# Altium PCB TinyTOF-Body.PcbDoc (part 1 of 3)
Units mil, origin at the board's own origin, x right, y up, seen from the top; angles counter-clockwise.
Board outline 6000 x 4000 mil, 6 copper layers (Component Side, Ground Plane (GND), Inner Layer 1, Inner Layer 2, Power Plane (VCC), Solder Side), stack 62.6 mil thick; 146 components, 158 nets, 1020 pads, 350 vias.
Unrouted connection lines stored in the file: 339.
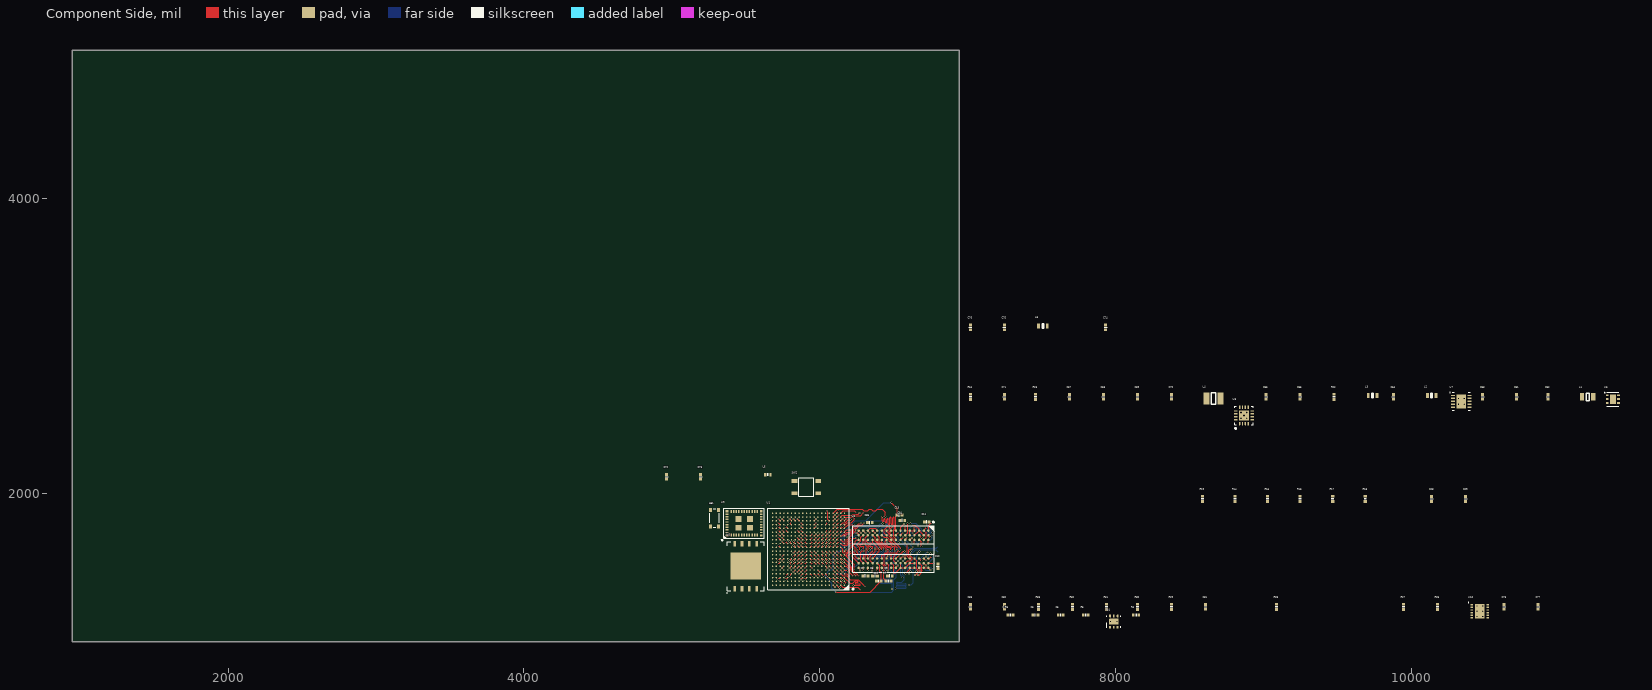
[diagram p0: Component Side view]
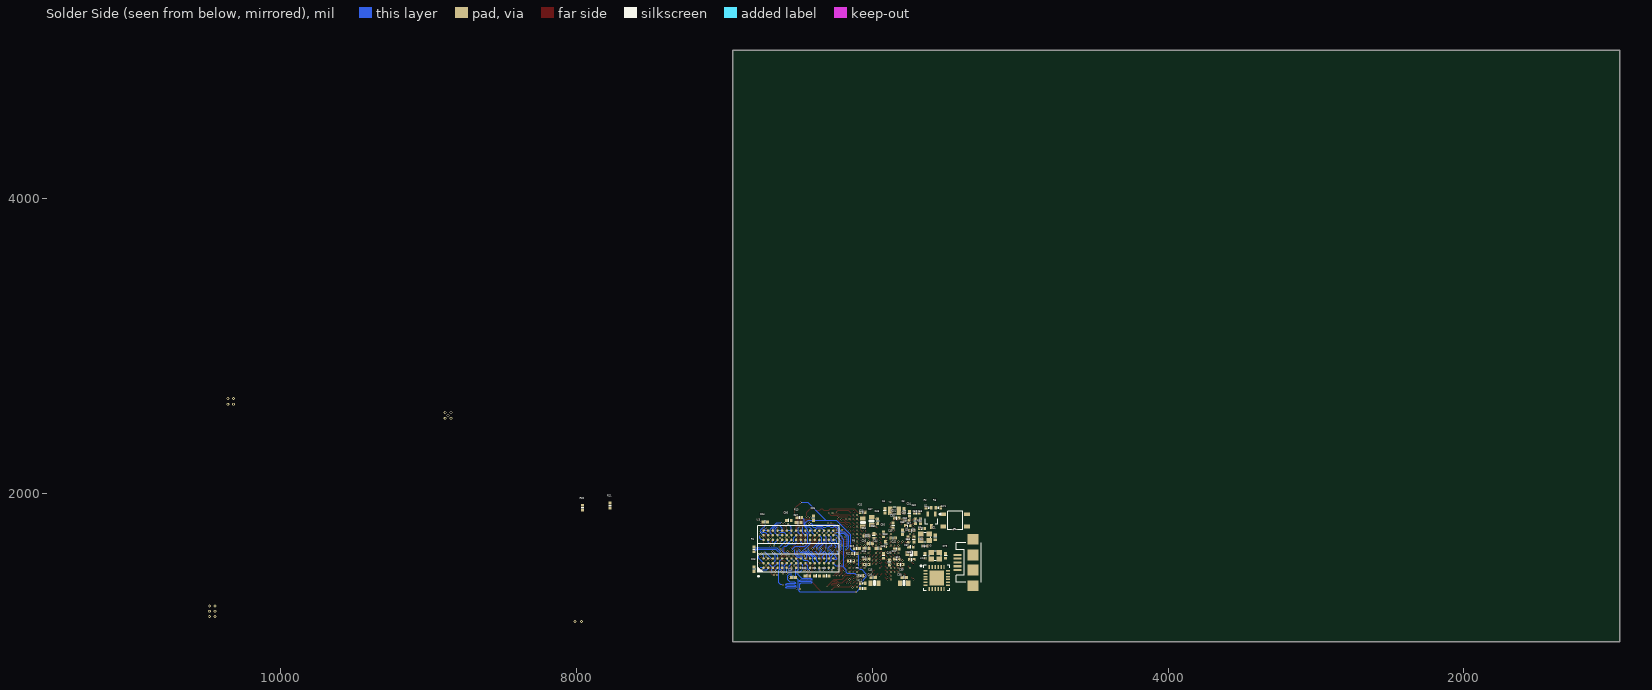
[diagram p1: Solder Side view, seen from below]
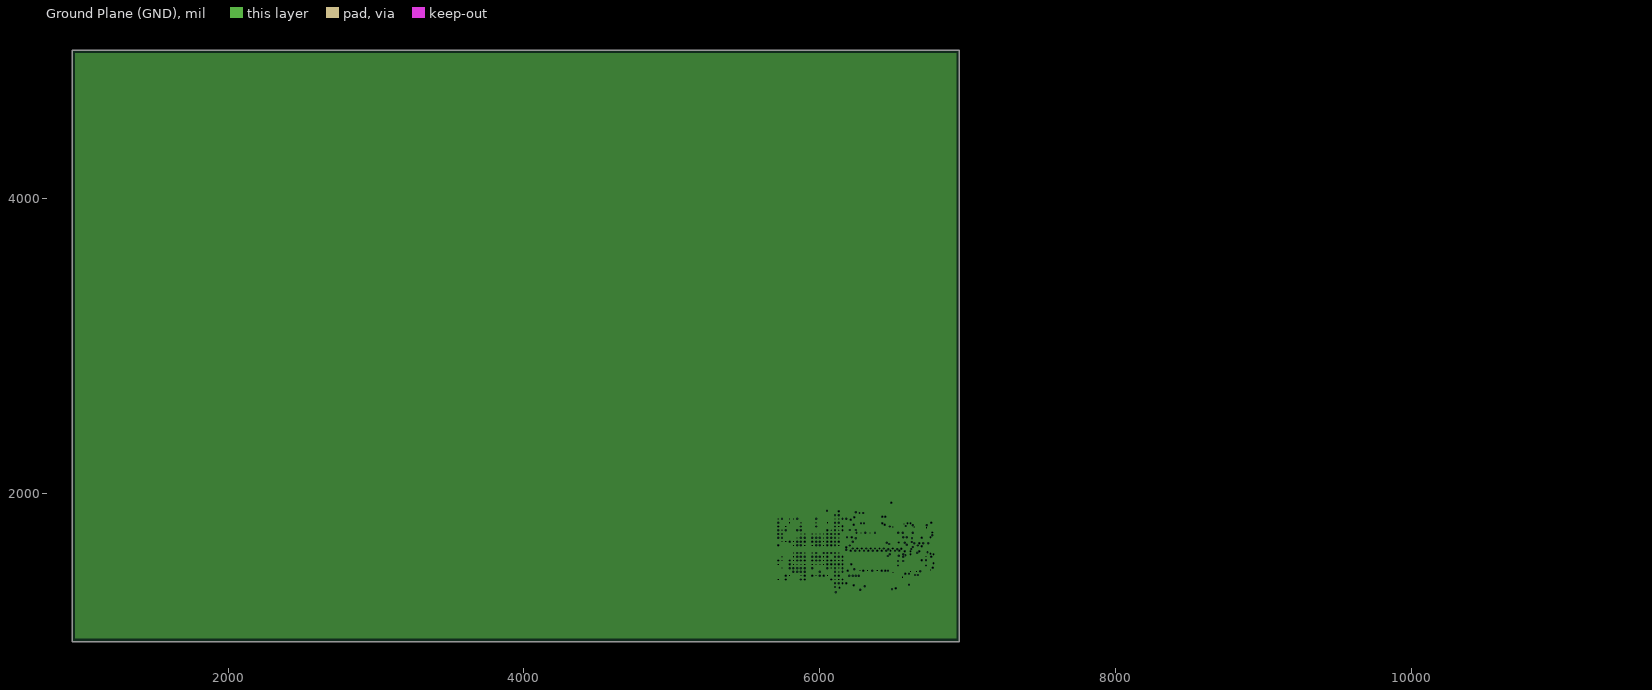
[diagram p2: Ground Plane (GND), clearances drawn from the general rule]
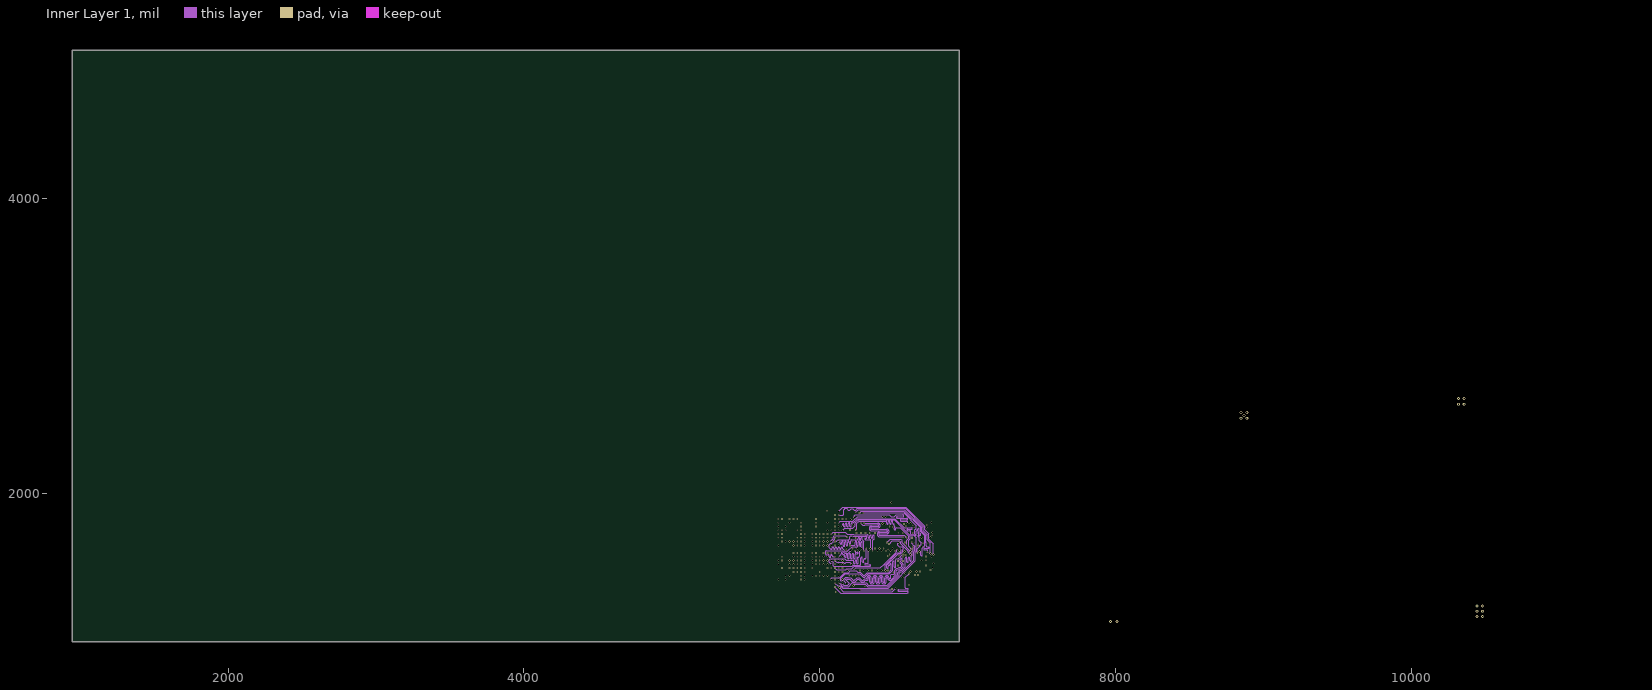
[diagram p3: Inner Layer 1]
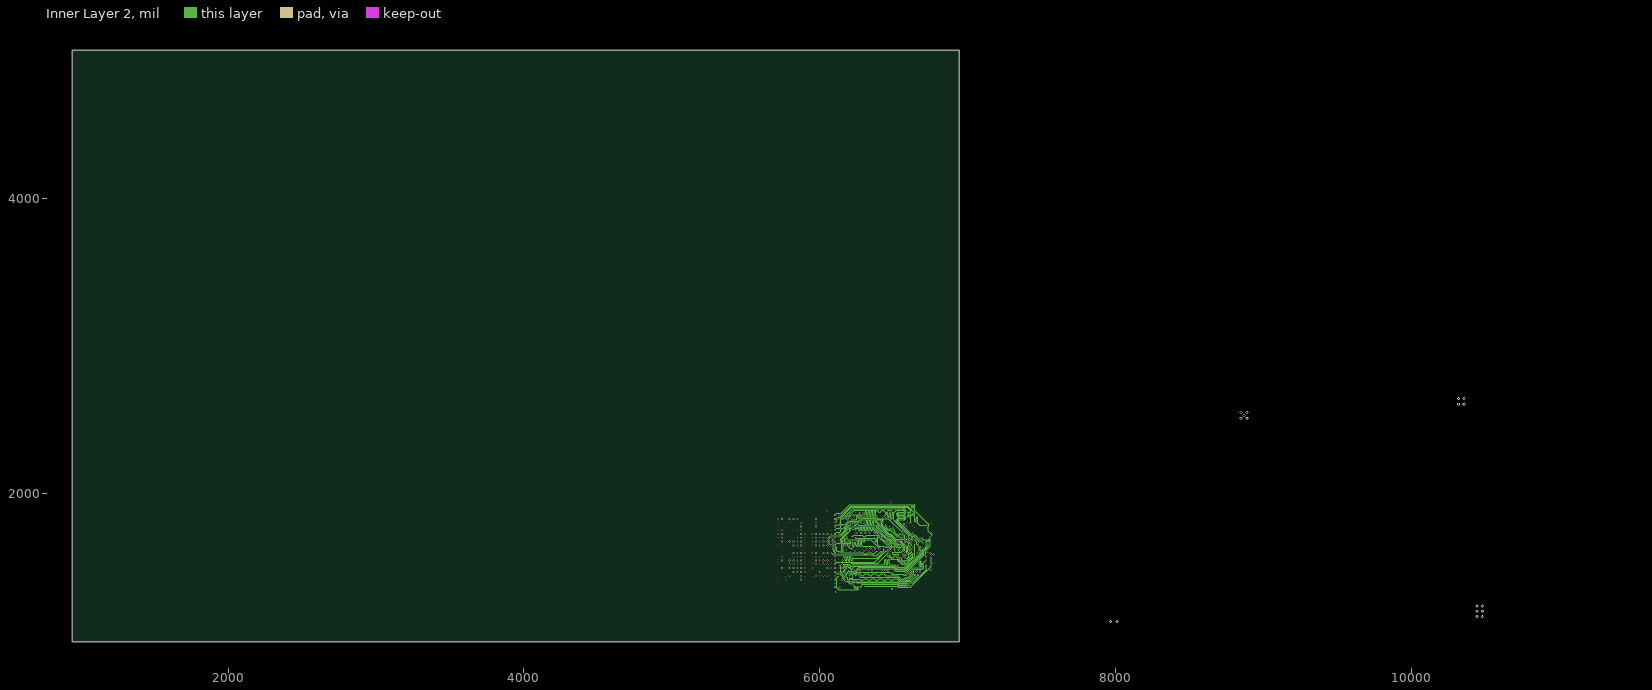
[diagram p4: Inner Layer 2]
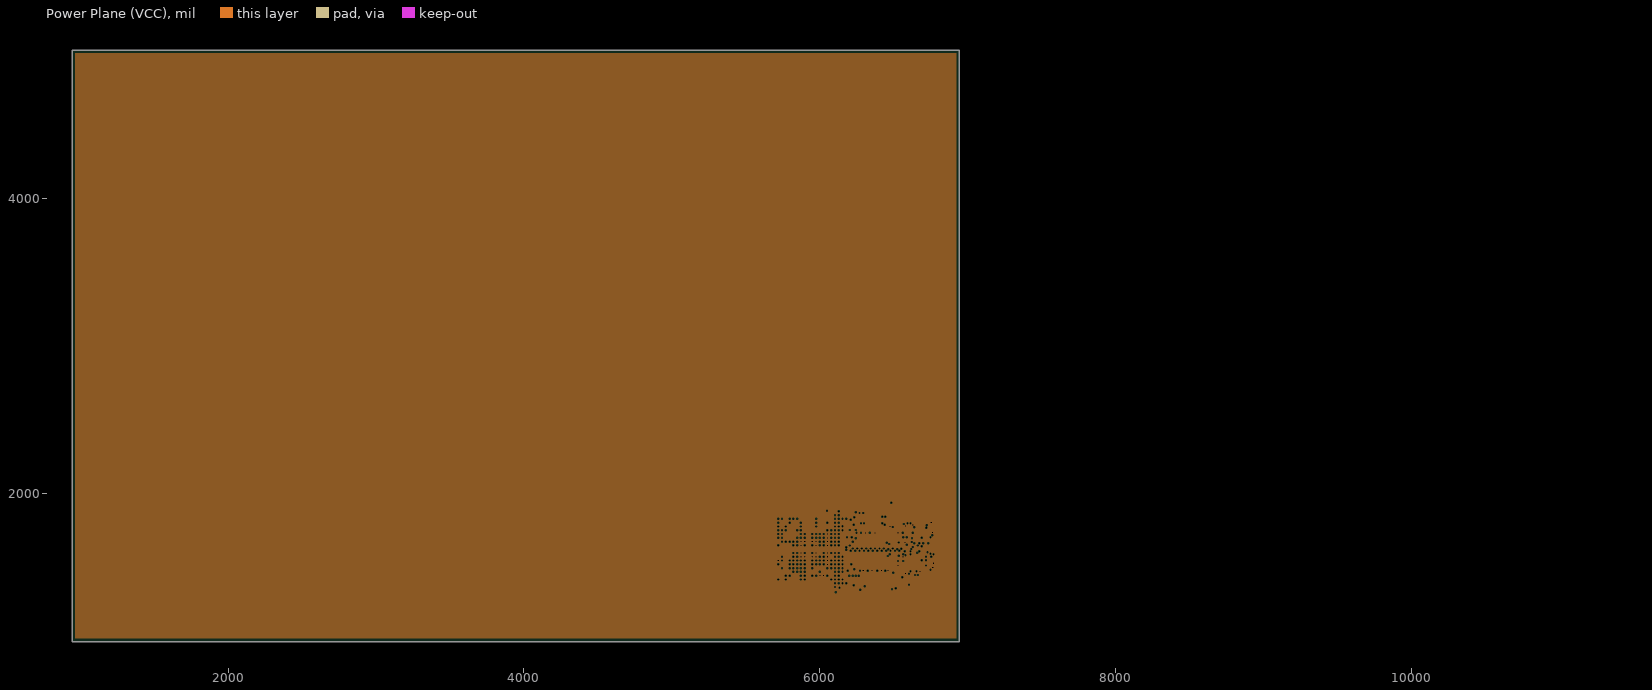
[diagram p5: Power Plane (VCC), clearances drawn from the general rule]

## Layer stack, top to bottom
Top Solder: solder mask 0.4, Solder Resist, Dk 3.5
Component Side: signal copper 1.4
Dielectric 1: prepreg 9.4, FR-4, Dk 4.2
Ground Plane (GND): plane copper 1.4, net GND
Dielectric 3: core 13, Dk 4.2
Inner Layer 1: signal copper 1.4
Dielectric 6: prepreg 9.4, Dk 4.2
Inner Layer 2: signal copper 1.4
Dielectric 5: core 13, Dk 4.2
Power Plane (VCC): plane copper 1.4, net 1V4
Dielectric 4: prepreg 9.4, Dk 4.2
Solder Side: signal copper 1.4
Bottom Solder: solder mask 0.4, Solder Resist, Dk 3.5

## Board outline
945,1000 6945,1000 6945,5000 945,5000

## Design rules (kind name [scope] priority, off if disabled: settings)
Clearance [All] p1: gap=4
DiffPairsRouting [All] p1: maxlimit=10 minlimit=5 mostfreqgap=5 toplayer_minwidth=5 toplayer_maxwidth=15 toplayer_prefwidth=5 midlayer1_minwidth=5 midlayer1_maxwidth=15 midlayer1_prefwidth=5 midlayer2_minwidth=5 midlayer2_maxwidth=15 midlayer2_prefwidth=5 bottomlayer_minwidth=5 bottomlayer_maxwidth=15 bottomlayer_prefwidth=5 maxuncoupledlength=100
Length Length_Clk [InNetClass('DRAM_CLK')] p1: maxlimit=2250 minlimit=0
MatchedLengths MatchedLengths_Clk [InNetClass('DRAM_CLK')] p1: tolerance=5 checknetsindiffpair=TRUE checkdiffpairvsdiffpair=FALSE checkxsignals=FALSE checkothers=FALSE
MatchedLengths MatchedLengths_Ctrl [InNetClass('DRAM_CTRL')] p2: tolerance=50 checknetsindiffpair=FALSE checkdiffpairvsdiffpair=TRUE checkxsignals=TRUE checkothers=TRUE
MatchedLengths MatchedLengths_AddrComm [InNetClass('DRAM_ADDR_COMM')] p3: tolerance=25 checknetsindiffpair=FALSE checkdiffpairvsdiffpair=TRUE checkxsignals=TRUE checkothers=TRUE
MatchedLengths MatchedLengths_1 [InNetClass('DRAM_GROUP1')] p4: tolerance=25 checknetsindiffpair=FALSE checkdiffpairvsdiffpair=TRUE checkxsignals=TRUE checkothers=TRUE
MatchedLengths MatchedLengths_2 [InNetClass('DRAM_GROUP2')] p5: tolerance=25 checknetsindiffpair=FALSE checkdiffpairvsdiffpair=TRUE checkxsignals=TRUE checkothers=TRUE
MatchedLengths MatchedLengths_3 [InNetClass('DRAM_GROUP3')] p6: tolerance=25 checknetsindiffpair=FALSE checkdiffpairvsdiffpair=TRUE checkxsignals=TRUE checkothers=TRUE
MatchedLengths MatchedLengths_4 [InNetClass('DRAM_GROUP4')] p7: tolerance=25 checknetsindiffpair=FALSE checkdiffpairvsdiffpair=TRUE checkxsignals=TRUE checkothers=TRUE
MatchedLengths MatchedLengths_Diff [(InNetClass('DRAM_ADDR_COMM') OR InNetClass('DRAM_GROUP1') OR InNetClass('DRAM_GROUP2') OR InNetClass('DRAM_GROUP3') OR InNetClass('DRAM_GROUP4'))] p8: tolerance=10 checknetsindiffpair=TRUE checkdiffpairvsdiffpair=FALSE checkxsignals=FALSE checkothers=FALSE
PlaneClearance [All] p1: clearance=5
PlaneConnect [All] p1: planeconnectstyle=Direct reliefexpansion=20 reliefentries=4 reliefconductorwidth=10 reliefairgap=10
PolygonConnect [All] p1: connectstyle=Relief reliefconductorwidth=20 reliefentries=4 polygonreliefangle="90 Angle" airgapwidth=5
RoutingVias [All] p1: holewidth=6 width=12 viastyle="Through Hole" minholewidth=6 minwidth=12 maxholewidth=12 maxwidth=24
SolderMaskExpansion SolderMaskExpansion_Via [IsVia] p1: expansion=0 soldermaskfromhole=TRUE
SolderMaskExpansion [All] p2: expansion=2
Width [All] p1: maxlimit=20 minlimit=3 preferedwidth=5
27 further rules are at their usual default settings.

## Classes and differential pairs
component class U_USB: C77 C78 C79 C80 C81 C82 C83 JP1 R26 R27 R28 R29 R30 R31 R32 R33 U10 U11 Y3
net class DRAM_CLK: DRAM_CLK_N DRAM_CLK_P
net class DRAM_A[14..0]: DRAM_A0 DRAM_A1 DRAM_A2 DRAM_A3 DRAM_A4 DRAM_A5 DRAM_A6 DRAM_A7 DRAM_A8 DRAM_A9 DRAM_A10 DRAM_A11 DRAM_A12 DRAM_A13 DRAM_A14
net class DRAM_D[31..0]: DRAM_D0 DRAM_D1 DRAM_D2 DRAM_D3 DRAM_D4 DRAM_D5 DRAM_D6 DRAM_D7 DRAM_D8 DRAM_D9 DRAM_D10 DRAM_D11 DRAM_D12 DRAM_D13 DRAM_D14 DRAM_D15 DRAM_D16 DRAM_D17 DRAM_D18 DRAM_D19 DRAM_D20 DRAM_D21 DRAM_D22 DRAM_D23 DRAM_D24 DRAM_D25 DRAM_D26 DRAM_D27 DRAM_D28 DRAM_D29 DRAM_D30 DRAM_D31
net class DRAM_CTRL: DRAM_CS DRAM_SDCKE DRAM_SDODT
net class DRAM_GROUP1: DRAM_D0 DRAM_D1 DRAM_D2 DRAM_D3 DRAM_D4 DRAM_D5 DRAM_D6 DRAM_D7 DRAM_DQM0 DRAM_DQS0_N DRAM_DQS0_P
net class DRAM_GROUP2: DRAM_D8 DRAM_D9 DRAM_D10 DRAM_D11 DRAM_D12 DRAM_D13 DRAM_D14 DRAM_D15 DRAM_DQM1 DRAM_DQS1_N DRAM_DQS1_P
net class DRAM_GROUP3: DRAM_D16 DRAM_D17 DRAM_D18 DRAM_D19 DRAM_D20 DRAM_D21 DRAM_D22 DRAM_D23 DRAM_DQM2 DRAM_DQS2_N DRAM_DQS2_P
net class DRAM_GROUP4: DRAM_D24 DRAM_D25 DRAM_D26 DRAM_D27 DRAM_D28 DRAM_D29 DRAM_D30 DRAM_D31 DRAM_DQM3 DRAM_DQS3_N DRAM_DQS3_P
net class DRAM_ADDR_COMM: DRAM_A0 DRAM_A1 DRAM_A2 DRAM_A3 DRAM_A4 DRAM_A5 DRAM_A6 DRAM_A7 DRAM_A8 DRAM_A9 DRAM_A10 DRAM_A11 DRAM_A12 DRAM_A13 DRAM_A14 DRAM_CAS DRAM_RAS DRAM_SDBA0 DRAM_SDBA1 DRAM_SDBA2 DRAM_WE
component class U_MPU-Control: C1 C2 C3 C4 C5 C6 Q1 R2 R3 R4 R5 R6 R34 SW1 SW2 U4 Y1 Y2
component class U_MPU-Memory: C7 C8 C9 C10 C11 C12 C13 C14 C15 C16 C17 C18 C19 C20 C21 C22 C23 C24 C25 C26 C84 C85 C86 C87 R1 R7 R8 R9 R10 R11 R12 R13 U2 U3
component class U_MPU-Peripherals: C27 C28 C29 C30 C31 C32 C33 C34 R14 R15 R16 R17 R18 R19 R20 R21 R25 U5
component class U_MPU-Power: C35 C36 C37 C38 C39 C40 C41 C42 C43 C44 C45 C46 C47 C48 C49 C50 C51 C52 C53 C54 C55 C56 C57 C58 C59 C60 U1
component class U_Supplies: C61 C62 C63 C64 C65 C66 C67 C68 C69 C70 C71 D1 L1 L2 L3 L4 R22 R23 R24 U6 U7 U8
component class U_WiFi: AE1 C72 C73 C74 C75 C76 L5 L6 U9
differential pair USB_OTG: +USB_OTG_P -USB_OTG_N
differential pair DRAM_DQS0: +DRAM_DQS0_P -DRAM_DQS0_N
differential pair DRAM_DQS1: +DRAM_DQS1_P -DRAM_DQS1_N
differential pair DRAM_DQS2: +DRAM_DQS2_P -DRAM_DQS2_N
differential pair DRAM_DQS3: +DRAM_DQS3_P -DRAM_DQS3_N
differential pair DRAM_CLK: +DRAM_CLK_P -DRAM_CLK_N

## Components (designator, comment, footprint, x,y, rotation, side; value= is the part's Value field where it differs from the comment)
AE1 "2450AT18D0100E" ANTENNA 5290,1835 r90 top
C1 "12pF 50V 0402" C0402[1005X55] 5575,1705 r90 bottom
C2 "12pF 50V 0402" C0402[1005X55] 5645,1645 r0 bottom
C3 "12pF 50V 0402" C0402[1005X55] 5785,1885 r270 bottom
C4 "12pF 50V 0402" C0402[1005X55] 5915,1885 r270 bottom
C5 "0.1uF 6.3V 0402" C0402[1005X55] 7630,1180 r0 top
C6 "3.3nF 50V 0402" C0402[1005X55] 7460,1180 r0 top
C7 "0.22uF 6.3V 0402" C0402[1005X55] 6310,1445 r180 top
C8 "0.22uF 6.3V 0402" C0402[1005X55] 6375,1445 r180 top
C9 "0.22uF 6.3V 0402" C0402[1005X55] 6475,1445 r180 top
C10 "0.22uF 6.3V 0402" C0402[1005X55] 6800,1510 r90 top
C11 "0.22uF 6.3V 0402" C0402[1005X55] 6725,1810 r0 top
C12 "0.22uF 6.3V 0402" C0402[1005X55] 6400,1410 r0 top
C13 "0.22uF 6.3V 0402" C0402[1005X55] 6540,1855 r180 top
C14 "0.22uF 6.3V 0402" C0402[1005X55] 6040,1715 r0 bottom
C15 "0.22uF 6.3V 0402" C0402[1005X55] 6040,1560 r0 bottom
C16 "0.22uF 6.3V 0402" C0402[1005X55] 6040,1630 r0 bottom
C17 "0.22uF 6.3V 0402" C0402[1005X55] 6040,1520 r0 bottom
C18 "22uF 6.3V 0603" C0603[1608X92] 6065,1805 r270 bottom
C19 "0.1uF 6.3V 0402" C0402[1005X55] 6120,1595 r180 bottom
C20 "0.22uF 6.3V 0402" C0402[1005X55] 6310,1445 r180 bottom
C21 "0.22uF 6.3V 0402" C0402[1005X55] 6375,1445 r180 bottom
C22 "0.22uF 6.3V 0402" C0402[1005X55] 6440,1445 r180 bottom
C23 "0.22uF 6.3V 0402" C0402[1005X55] 6800,1490 r90 bottom
C24 "0.22uF 6.3V 0402" C0402[1005X55] 6725,1810 r0 bottom
C25 "0.22uF 6.3V 0402" C0402[1005X55] 6400,1835 r270 bottom
C26 "0.22uF 6.3V 0402" C0402[1005X55] 6535,1435 r180 bottom
C27 "0.22uF 6.3V 0402" C0402[1005X55] 5810,1520 r180 bottom
C28 "0.22uF 6.3V 0402" C0402[1005X55] 10140,1965 r90 top
C29 "4.7uF 6.3V 0402" C0402[1005X55] 10370,1965 r90 top
C30 "0.22uF 6.3V 0402" C0402[1005X55] 5860,1785 r270 bottom
C31 "0.22uF 6.3V 0402" C0402[1005X55] 5835,1835 r0 bottom
C32 "1uF 16V 0402" C0402[1005X55] 5700,1870 r180 bottom
C33 "0.22uF 6.3V 0402" C0402[1005X55] 5770,1820 r180 bottom
C34 "10uF 6.3V 0402" C0402[1005X55] 5750,1865 r270 bottom
C35 "0.22uF 6.3V 0402" C0402[1005X55] 5735,1555 r180 bottom
C36 "0.22uF 6.3V 0402" C0402[1005X55] 5925,1580 r270 bottom
C37 "22uF 6.3V 0603" C0603[1608X92] 5735,1595 r180 bottom
C38 "22uF 6.3V 0603" C0603[1608X92] 5785,1395 r180 bottom
C39 "0.22uF 6.3V 0402" C0402[1005X55] 5785,1435 r180 bottom
C40 "0.22uF 6.3V 0402" C0402[1005X55] 5885,1535 r90 bottom
C41 "0.22uF 6.3V 0402" C0402[1005X55] 5835,1560 r0 bottom
C42 "0.22uF 6.3V 0402" C0402[1005X55] 5835,1625 r0 bottom
C43 "0.22uF 6.3V 0402" C0402[1005X55] 5910,1660 r90 bottom
C44 "0.22uF 6.3V 0402" C0402[1005X55] 5960,1630 r0 bottom
C45 "0.22uF 6.3V 0402" C0402[1005X55] 5995,1435 r0 bottom
C46 "22uF 6.3V 0603" C0603[1608X92] 5985,1395 r0 bottom
C47 "22uF 6.3V 0603" C0603[1608X92] 6005,1815 r90 bottom
C48 "0.22uF 6.3V 0402" C0402[1005X55] 5965,1815 r90 bottom
C49 "0.22uF 6.3V 0402" C0402[1005X55] 5860,1700 r0 bottom
C50 "0.22uF 6.3V 0402" C0402[1005X55] 5925,1725 r270 bottom
C51 "0.22uF 6.3V 0402" C0402[1005X55] 5990,1715 r270 bottom
C52 "0.22uF 6.3V 0402" C0402[1005X55] 6015,1665 r180 bottom
C53 "4.7uF 6.3V 0402" C0402[1005X55] 5740,1640 r180 bottom
C54 "4.7uF 6.3V 0402" C0402[1005X55] 5760,1690 r90 bottom
C55 "0.22uF 6.3V 0402" C0402[1005X55] 5720,1690 r90 bottom
C56 "0.22uF 6.3V 0402" C0402[1005X55] 5795,1740 r270 bottom
C57 "4.7uF 6.3V 0402" C0402[1005X55] 5735,1750 r180 bottom
C58 "4.7uF 6.3V 0402" C0402[1005X55] 5675,1815 r270 bottom
C59 "0.22uF 6.3V 0402" C0402[1005X55] 5710,1815 r270 bottom
C60 "0.22uF 6.3V 0402" C0402[1005X55] 5760,1785 r180 bottom
C61 "10uF 6.3V 0402" C0402[1005X55] 10715,2655 r90 top
C62 "10uF 6.3V 0402" C0402[1005X55] 10925,2655 r90 top
C63 "10uF 6.3V 0402" C0402[1005X55] 10485,2655 r90 top
C64 "10uF 6.3V 0402" C0402[1005X55] 9880,2655 r90 top
C65 "10uF 6.3V 0402" C0402[1005X55] 9250,2655 r90 top
C66 "3.3nF 50V 0402" C0402[1005X55] 9020,2655 r90 top
C67 "10uF 6.3V 0402" C0402[1005X55] 7690,2655 r90 top
C68 "0.1uF 6.3V 0402" C0402[1005X55] 7920,2655 r90 top
C69 "10uF 6.3V 0402" C0402[1005X55] 8150,2655 r90 top
C70 "10uF 6.3V 0402" C0402[1005X55] 8380,2655 r90 top
C71 "3.3nF 50V 0402" C0402[1005X55] 7250,2655 r90 top
C72 "1.5pF 50V 0402" C0402[1005X55] 4965,2115 r90 top
C73 "1.5pF 50V 0402" C0402[1005X55] 5195,2115 r90 top
C74 "2.2uF 6.3V 0402" C0402[1005X55] 7935,3125 r90 top
C75 "4.7uF 6.3V 0402" C0402[1005X55] 7250,3125 r90 top
C76 "4.7uF 6.3V 0402" C0402[1005X55] 7020,3125 r90 top
C77 "4.7uF 6.3V 0402" C0402[1005X55] 10860,1235 r90 top
C78 "0.1uF 6.3V 0402" C0402[1005X55] 10630,1235 r90 top
C79 "12pF 50V 0402" C0402[1005X55] 5505,1580 r90 bottom
C80 "12pF 50V 0402" C0402[1005X55] 5645,1580 r270 bottom
C81 "1uF 6.3V 0402" C0402[1005X55] 8610,1235 r90 top
C82 "1uF 6.3V 0402" C0402[1005X55] 7250,1235 r90 top
C83 "0.1uF 6.3V 0402" C0402[1005X55] 7020,1235 r90 top
C84 "0.22uF 6.3V 0402" C0402[1005X55] 6560,1820 r0 top
C85 "0.22uF 6.3V 0402" C0402[1005X55] 6340,1805 r180 top
C86 "0.22uF 6.3V 0402" C0402[1005X55] 6565,1820 r180 bottom
C87 "0.22uF 6.3V 0402" C0402[1005X55] 6500,1805 r180 bottom
JP1 "USB" USB-MICROB 5320,1535 r90 bottom
L1 "2.2uH" IND0805 11195,2655 r0 top
L2 "2.2uH" IND0603 10140,2665 r0 top
L3 "2.2uH" IND0603 9740,2665 r0 top
L4 "2.2uH" IND1008 8665,2645 r0 top
L5 "3.9nH" IND0402 5650,2130 r0 top
L6 "2.2uH" IND0603 7510,3135 r0 top
Q1 "BSS123WQ-7-F" SOT323-3 5600,1820 r270 bottom
R1 "200R 1% 0402" R0402[1005] 6800,1625 r90 bottom
R2 "10K 1% 0402" R0402[1005] 5620,1905 r0 bottom
R3 "10K 1% 0402" R0402[1005] 5555,1905 r0 bottom
R4 "10K 1% 0402" R0402[1005] 8140,1180 r0 top
R5 "15K 1% 0402" R0402[1005] 7800,1180 r0 top
R6 "75K 1% 0402" R0402[1005] 7290,1180 r0 top
R7 "240R 1% 0402" R0402[1005] 6465,1410 r0 top
R8 "10K 1% 0402" R0402[1005] 6105,1630 r180 bottom
R9 "10K 1% 0402" R0402[1005] 6080,1445 r0 bottom
R10 "1K 1% 0402" R0402[1005] 6065,1395 r180 bottom
R11 "1K 1% 0402" R0402[1005] 6065,1360 r0 bottom
R12 "240R 1% 0402" R0402[1005] 6145,1545 r0 bottom
R13 "240R 1% 0402" R0402[1005] 6495,1840 r0 bottom
R14 "100K 1% 0402" R0402[1005] 8810,1965 r90 top
R15 "100K 1% 0402" R0402[1005] 9030,1965 r90 top
R16 "100K 1% 0402" R0402[1005] 9250,1965 r90 top
R17 "100K 1% 0402" R0402[1005] 9470,1965 r90 top
R18 "100K 1% 0402" R0402[1005] 9690,1965 r90 top
R19 "10R 1% 0402" R0402[1005] 8590,1965 r90 top
R20 "4K7 1% 0402" R0402[1005] 7960,1905 r90 bottom
R21 "4K7 1% 0402" R0402[1005] 7775,1920 r90 bottom
R22 "1M 1% 0402" R0402[1005] 9480,2655 r90 top
R23 "150K 1% 0402" R0402[1005] 7460,2655 r90 top
R24 "200K 1% 0402" R0402[1005] 7020,2655 r90 top
R25 "10K 1% 0402" R0402[1005] 6065,1875 r180 bottom
R26 "22R 1% 0402" R0402[1005] 10180,1235 r90 top
R27 "22R 1% 0402" R0402[1005] 9950,1235 r90 top
R28 "12K 1% 0402" R0402[1005] 9090,1235 r90 top
R29 "51K 1% 0402" R0402[1005] 8380,1235 r90 top
R30 "100K 1% 0402" R0402[1005] 8150,1235 r90 top
R31 "100K 1% 0402" R0402[1005] 7940,1235 r90 top
R32 "51K 1% 0402" R0402[1005] 7710,1235 r90 top
R33 "51K 1% 0402" R0402[1005] 7480,1235 r90 top
R34 "2M2 1% 0402" R0402[1005] 5665,1765 r0 bottom
SW1 "BOOT" SWITCH 5440,1820 r0 bottom
SW2 "RESET" SWITCH 5910,2045 r0 top
U1 "MCIMX6X3EVO10AB" BGA-400 5925,1625 r180 top
U2 "MT41K256M16TW-107" BGA-96 6500,1625 r270 top
U3 "MT41K256M16TW-107" BGA-96 6500,1625 r90 bottom
U4 "TPS3808G12DRVR" DRV0006A_V 7990,1135 r90 top
U5 "W25N01GVZEIG" "WSON-8 (6X8MM)" 5500,1510 r90 top
U6 "TPS62291DRVR" WSON-6 11365,2640 r0 top
U7 "LTC3407EDD-3#PBF" LT-DD-10_V 10340,2625 r0 top
U8 "TPS62130RGTR" RGT0016C_V 8870,2530 r90 top
U9 "LBWA1KL1FX-875" LGA-42 5490,1800 r90 top
U10 "FT234XD-R" DFN-12_V 10465,1205 r0 top
U11 "USB2422/MJ" "QFN-24 (4x4MM)" 5565,1430 r180 bottom
Y1 "24MHz" CRYSTAL_2.0x1.6 5645,1705 r180 bottom
Y2 "32.768kHz" CRYSTAL_2.0x1.2 5850,1885 r0 bottom
Y3 "24MHz" CRYSTAL_2.0x1.6 5575,1580 r0 bottom

## Footprints (in the part's own frame and the unit in brackets; to place one, negate y for a bottom-side part, rotate by r counter-clockwise, add the part's x,y. Pads: shape width x height; smd on the part's side, far side on the other; paste and mask are expansions set on the pad)
ANTENNA [mm]
  rect 0.7x0.5 smd: 1(-1.4,-0.7) 2(1.4,-0.7) 3(1.4,0.7) 4(-1.4,0.7)
  silkscreen extent -1.6,-0.8 1.6,0.8, body extent -1.6,-0.8 1.6,0.8, height 1.2
BGA-96 [mm] "BGA, 96-Leads, Body 8.00x14.00mmx1.10mm, Pitch 0.80mm"
  round 0.42 smd: A1(-3.2,6) A2(-2.4,6) A3(-1.6,6) A7(1.6,6) A8(2.4,6) A9(3.2,6) B1(-3.2,5.2) B2(-2.4,5.2) B3(-1.6,5.2) B7(1.6,5.2) B8(2.4,5.2) B9(3.2,5.2) C1(-3.2,4.4) C2(-2.4,4.4) C3(-1.6,4.4) C7(1.6,4.4) C8(2.4,4.4) C9(3.2,4.4) D1(-3.2,3.6) D2(-2.4,3.6) D3(-1.6,3.6) D7(1.6,3.6) D8(2.4,3.6) D9(3.2,3.6) E1(-3.2,2.8) E2(-2.4,2.8) E3(-1.6,2.8) E7(1.6,2.8) E8(2.4,2.8) E9(3.2,2.8) F1(-3.2,2) F2(-2.4,2) F3(-1.6,2) F7(1.6,2) F8(2.4,2) F9(3.2,2) G1(-3.2,1.2) G2(-2.4,1.2) G3(-1.6,1.2) G7(1.6,1.2) G8(2.4,1.2) G9(3.2,1.2) H1(-3.2,0.4) H2(-2.4,0.4) H3(-1.6,0.4) H7(1.6,0.4) H8(2.4,0.4) H9(3.2,0.4) J1(-3.2,-0.4) J2(-2.4,-0.4) J3(-1.6,-0.4) J7(1.6,-0.4) J8(2.4,-0.4) J9(3.2,-0.4) K1(-3.2,-1.2) K2(-2.4,-1.2) K3(-1.6,-1.2) K7(1.6,-1.2) K8(2.4,-1.2) K9(3.2,-1.2) L1(-3.2,-2) L2(-2.4,-2) L3(-1.6,-2) L7(1.6,-2) L8(2.4,-2) L9(3.2,-2) M1(-3.2,-2.8) M2(-2.4,-2.8) M3(-1.6,-2.8) M7(1.6,-2.8) M8(2.4,-2.8) M9(3.2,-2.8) N1(-3.2,-3.6) N2(-2.4,-3.6) N3(-1.6,-3.6) N7(1.6,-3.6) N8(2.4,-3.6) N9(3.2,-3.6) P1(-3.2,-4.4) P2(-2.4,-4.4) P3(-1.6,-4.4) P7(1.6,-4.4) P8(2.4,-4.4) P9(3.2,-4.4) R1(-3.2,-5.2) R2(-2.4,-5.2) R3(-1.6,-5.2) R7(1.6,-5.2) R8(2.4,-5.2) R9(3.2,-5.2) T1(-3.2,-6) T2(-2.4,-6) T3(-1.6,-6) T7(1.6,-6) T8(2.4,-6) T9(3.2,-6)
  silkscreen extent -4.77,-7 4,7, body extent -4,-7 4,7, height 1.1
BGA-400 [mm] "BGA, 400-Leads, Body 14.00x14.00mmx1.30mm, Pitch 0.65mm"
  round 0.25 smd: A1(-6.175,6.175) A2(-5.525,6.175) A3(-4.875,6.175) A4(-4.225,6.175) A5(-3.575,6.175) A6(-2.925,6.175) A7(-2.275,6.175) A8(-1.625,6.175) A9(-0.975,6.175) A10(-0.325,6.175) A11(0.325,6.175) A12(0.975,6.175) A13(1.625,6.175) A14(2.275,6.175) A15(2.925,6.175) A16(3.575,6.175) A17(4.225,6.175) A18(4.875,6.175) A19(5.525,6.175) A20(6.175,6.175) B1(-6.175,5.525) B2(-5.525,5.525) B3(-4.875,5.525) B4(-4.225,5.525) B5(-3.575,5.525) B6(-2.925,5.525) B7(-2.275,5.525) B8(-1.625,5.525) B9(-0.975,5.525) B10(-0.325,5.525) B11(0.325,5.525) B12(0.975,5.525) B13(1.625,5.525) B14(2.275,5.525) B15(2.925,5.525) B16(3.575,5.525) B17(4.225,5.525) B18(4.875,5.525) B19(5.525,5.525) B20(6.175,5.525) C1(-6.175,4.875) C2(-5.525,4.875) C3(-4.875,4.875) C4(-4.225,4.875) C5(-3.575,4.875) C6(-2.925,4.875) C7(-2.275,4.875) C8(-1.625,4.875) C9(-0.975,4.875) C10(-0.325,4.875) C11(0.325,4.875) C12(0.975,4.875) C13(1.625,4.875) C14(2.275,4.875) C15(2.925,4.875) C16(3.575,4.875) C17(4.225,4.875) C18(4.875,4.875) C19(5.525,4.875) C20(6.175,4.875) D1(-6.175,4.225) D2(-5.525,4.225) D3(-4.875,4.225) D4(-4.225,4.225) D5(-3.575,4.225) D6(-2.925,4.225) D7(-2.275,4.225) D8(-1.625,4.225) D9(-0.975,4.225) D10(-0.325,4.225) D11(0.325,4.225) D12(0.975,4.225) D13(1.625,4.225) D14(2.275,4.225) D15(2.925,4.225) D16(3.575,4.225) D17(4.225,4.225) D18(4.875,4.225) D19(5.525,4.225) D20(6.175,4.225) E1(-6.175,3.575) E2(-5.525,3.575) E3(-4.875,3.575) E4(-4.225,3.575) E5(-3.575,3.575) E6(-2.925,3.575) E7(-2.275,3.575) E8(-1.625,3.575) E9(-0.975,3.575) E10(-0.325,3.575) E11(0.325,3.575) E12(0.975,3.575) E13(1.625,3.575) E14(2.275,3.575) E15(2.925,3.575) E16(3.575,3.575) E17(4.225,3.575) E18(4.875,3.575) E19(5.525,3.575) E20(6.175,3.575) F1(-6.175,2.925) F2(-5.525,2.925) F3(-4.875,2.925) F4(-4.225,2.925) F5(-3.575,2.925) F6(-2.925,2.925) F7(-2.275,2.925) F8(-1.625,2.925) F9(-0.975,2.925) F10(-0.325,2.925) F11(0.325,2.925) F12(0.975,2.925) F13(1.625,2.925) F14(2.275,2.925) F15(2.925,2.925) F16(3.575,2.925) F17(4.225,2.925) F18(4.875,2.925) F19(5.525,2.925) F20(6.175,2.925) G1(-6.175,2.275) G2(-5.525,2.275) G3(-4.875,2.275) G4(-4.225,2.275) G5(-3.575,2.275) G6(-2.925,2.275) G7(-2.275,2.275) G8(-1.625,2.275) G9(-0.975,2.275) G10(-0.325,2.275) G11(0.325,2.275) G12(0.975,2.275) G13(1.625,2.275) G14(2.275,2.275) G15(2.925,2.275) G16(3.575,2.275) G17(4.225,2.275) G18(4.875,2.275) G19(5.525,2.275) G20(6.175,2.275) H1(-6.175,1.625) H2(-5.525,1.625) H3(-4.875,1.625) H4(-4.225,1.625) H5(-3.575,1.625) H6(-2.925,1.625) H7(-2.275,1.625) H8(-1.625,1.625) H9(-0.975,1.625) H10(-0.325,1.625) H11(0.325,1.625) H12(0.975,1.625) H13(1.625,1.625) H14(2.275,1.625) H15(2.925,1.625) H16(3.575,1.625) H17(4.225,1.625) H18(4.875,1.625) H19(5.525,1.625) H20(6.175,1.625) J1(-6.175,0.975) J2(-5.525,0.975) J3(-4.875,0.975) J4(-4.225,0.975) J5(-3.575,0.975) J6(-2.925,0.975) J7(-2.275,0.975) J8(-1.625,0.975) J9(-0.975,0.975) J10(-0.325,0.975) J11(0.325,0.975) J12(0.975,0.975) J13(1.625,0.975) J14(2.275,0.975) J15(2.925,0.975) J16(3.575,0.975) J17(4.225,0.975) J18(4.875,0.975) J19(5.525,0.975) J20(6.175,0.975) K1(-6.175,0.325) K2(-5.525,0.325) K3(-4.875,0.325) K4(-4.225,0.325) K5(-3.575,0.325) K6(-2.925,0.325) K7(-2.275,0.325) K8(-1.625,0.325) K9(-0.975,0.325) K10(-0.325,0.325) K11(0.325,0.325) K12(0.975,0.325) K13(1.625,0.325) K14(2.275,0.325) K15(2.925,0.325) K16(3.575,0.325) K17(4.225,0.325) K18(4.875,0.325) K19(5.525,0.325) K20(6.175,0.325) L1(-6.175,-0.325) L2(-5.525,-0.325) L3(-4.875,-0.325) L4(-4.225,-0.325) L5(-3.575,-0.325) L6(-2.925,-0.325) L7(-2.275,-0.325) L8(-1.625,-0.325) L9(-0.975,-0.325) L10(-0.325,-0.325) L11(0.325,-0.325) L12(0.975,-0.325) L13(1.625,-0.325) L14(2.275,-0.325) L15(2.925,-0.325) L16(3.575,-0.325) L17(4.225,-0.325) L18(4.875,-0.325) L19(5.525,-0.325) L20(6.175,-0.325) M1(-6.175,-0.975) M2(-5.525,-0.975) M3(-4.875,-0.975) M4(-4.225,-0.975) M5(-3.575,-0.975) M6(-2.925,-0.975) M7(-2.275,-0.975) M8(-1.625,-0.975) M9(-0.975,-0.975) M10(-0.325,-0.975) M11(0.325,-0.975) M12(0.975,-0.975) M13(1.625,-0.975) M14(2.275,-0.975) M15(2.925,-0.975) M16(3.575,-0.975) M17(4.225,-0.975) M18(4.875,-0.975) M19(5.525,-0.975) M20(6.175,-0.975) N1(-6.175,-1.625) N2(-5.525,-1.625) N3(-4.875,-1.625) N4(-4.225,-1.625) N5(-3.575,-1.625) N6(-2.925,-1.625) N7(-2.275,-1.625) N8(-1.625,-1.625) N9(-0.975,-1.625) N10(-0.325,-1.625) N11(0.325,-1.625) N12(0.975,-1.625) N13(1.625,-1.625) N14(2.275,-1.625) N15(2.925,-1.625) N16(3.575,-1.625) N17(4.225,-1.625) N18(4.875,-1.625) N19(5.525,-1.625) N20(6.175,-1.625) P1(-6.175,-2.275) P2(-5.525,-2.275) P3(-4.875,-2.275) P4(-4.225,-2.275) P5(-3.575,-2.275) P6(-2.925,-2.275) P7(-2.275,-2.275) P8(-1.625,-2.275) P9(-0.975,-2.275) P10(-0.325,-2.275) P11(0.325,-2.275) P12(0.975,-2.275) P13(1.625,-2.275) P14(2.275,-2.275) P15(2.925,-2.275) P16(3.575,-2.275) P17(4.225,-2.275) P18(4.875,-2.275) P19(5.525,-2.275) P20(6.175,-2.275) R1(-6.175,-2.925) R2(-5.525,-2.925) R3(-4.875,-2.925) R4(-4.225,-2.925) R5(-3.575,-2.925) R6(-2.925,-2.925) R7(-2.275,-2.925) R8(-1.625,-2.925) R9(-0.975,-2.925) R10(-0.325,-2.925) R11(0.325,-2.925) R12(0.975,-2.925) R13(1.625,-2.925) R14(2.275,-2.925) R15(2.925,-2.925) R16(3.575,-2.925) R17(4.225,-2.925) R18(4.875,-2.925) R19(5.525,-2.925) R20(6.175,-2.925) T1(-6.175,-3.575) T2(-5.525,-3.575) T3(-4.875,-3.575) T4(-4.225,-3.575) T5(-3.575,-3.575) T6(-2.925,-3.575) T7(-2.275,-3.575) T8(-1.625,-3.575) T9(-0.975,-3.575) T10(-0.325,-3.575) T11(0.325,-3.575) T12(0.975,-3.575) T13(1.625,-3.575) T14(2.275,-3.575) T15(2.925,-3.575) T16(3.575,-3.575) T17(4.225,-3.575) T18(4.875,-3.575) T19(5.525,-3.575) T20(6.175,-3.575) U1(-6.175,-4.225) U2(-5.525,-4.225) U3(-4.875,-4.225) U4(-4.225,-4.225) U5(-3.575,-4.225) U6(-2.925,-4.225) U7(-2.275,-4.225) U8(-1.625,-4.225) U9(-0.975,-4.225) U10(-0.325,-4.225) U11(0.325,-4.225) U12(0.975,-4.225) U13(1.625,-4.225) U14(2.275,-4.225) U15(2.925,-4.225) U16(3.575,-4.225) U17(4.225,-4.225) U18(4.875,-4.225) U19(5.525,-4.225) U20(6.175,-4.225) V1(-6.175,-4.875) V2(-5.525,-4.875) V3(-4.875,-4.875) V4(-4.225,-4.875) V5(-3.575,-4.875) V6(-2.925,-4.875) V7(-2.275,-4.875) V8(-1.625,-4.875) V9(-0.975,-4.875) V10(-0.325,-4.875) V11(0.325,-4.875) V12(0.975,-4.875) V13(1.625,-4.875) V14(2.275,-4.875) V15(2.925,-4.875) V16(3.575,-4.875) V17(4.225,-4.875) V18(4.875,-4.875) V19(5.525,-4.875) V20(6.175,-4.875) W1(-6.175,-5.525) W2(-5.525,-5.525) W3(-4.875,-5.525) W4(-4.225,-5.525) W5(-3.575,-5.525) W6(-2.925,-5.525) W7(-2.275,-5.525) W8(-1.625,-5.525) W9(-0.975,-5.525) W10(-0.325,-5.525) W11(0.325,-5.525) W12(0.975,-5.525) W13(1.625,-5.525) W14(2.275,-5.525) W15(2.925,-5.525) W16(3.575,-5.525) W17(4.225,-5.525) W18(4.875,-5.525) W19(5.525,-5.525) W20(6.175,-5.525) Y1(-6.175,-6.175) Y2(-5.525,-6.175) Y3(-4.875,-6.175) Y4(-4.225,-6.175) Y5(-3.575,-6.175) Y6(-2.925,-6.175) Y7(-2.275,-6.175) Y8(-1.625,-6.175) Y9(-0.975,-6.175) Y10(-0.325,-6.175) Y11(0.325,-6.175) Y12(0.975,-6.175) Y13(1.625,-6.175) Y14(2.275,-6.175) Y15(2.925,-6.175) Y16(3.575,-6.175) Y17(4.225,-6.175) Y18(4.875,-6.175) Y19(5.525,-6.175) Y20(6.175,-6.175)
  silkscreen extent -7.78,-7 7,7, body extent -7,-7 7,7, height 1.3
C0402[1005X55] [mm] "Chip Capacitor, Body 1.0x0.5mm"
  rect 0.5x0.52 smd: 1(-0.41,0) 2(0.41,0)
  silkscreen extent 0,-0.25 0,0.25, body extent -0.5,-0.25 0.5,0.25, height 0.56
C0603[1608X92] [mm] "Chip Capacitor, Body 1.6x0.8mm"
  rect 0.7x0.9 smd: 1(-0.7,0) 2(0.7,0)
  silkscreen extent -0.13,-0.38 0.13,0.38, body extent -0.8,-0.4 0.8,0.4, height 0.93
CRYSTAL_2.0x1.2 [mm]
  rect 0.75x1.4 smd mask+0: 1(-0.725,0) 2(0.725,0)
  silkscreen extent -0.2,-0.6 0.2,0.6, body extent -1,-0.6 1,0.6, height 0.61
CRYSTAL_2.0x1.6 [mm]
  rect 0.95x0.85 smd mask+0: 1(-0.725,-0.575) 2(-0.725,0.575) 2(0.725,-0.575) 3(0.725,0.575)
  silkscreen extent -1,-0.8 1,0.8
DFN-12_V [mm] "SON, 12-Leads, Body 3x3mm, Pitch 0.45mm, Thermal Pad 2.5x1.6mm"
  rect 0.4x0.25 smd: 1(-1.35,1.125) 2(-1.35,0.675) 3(-1.35,0.225) 4(-1.35,-0.225) 5(-1.35,-0.675) 6(-1.35,-1.125) 7(1.35,-1.125) 8(1.35,-0.675) 9(1.35,-0.225) 10(1.35,0.225) 11(1.35,0.675) 12(1.35,1.125)
  rect 1.6x2.5 smd mask+0.102: 13(0,0)
  silkscreen extent -2,1.45 -1.9,1.55, body extent -1.5,-1.5 1.5,1.5, height 0.9
DRV0006A_V [mm] "SON, 6-Leads, Body 2x2mm, Pitch 0.65mm, Thermal Pad 1.6x1mm, TI Recommended"
  rrect33% 0.45x0.3 smd: 1(-0.975,0.65) 2(-0.975,0) 3(-0.975,-0.65) 4(0.975,-0.65) 5(0.975,0) 6(0.975,0.65)
  rrect14% 1x0.7 on Top Paste: 7(0,0.45) 7(0,-0.45)
  rrect10% 1x1.6 smd paste-0.5: 7(0,0)
  silkscreen extent -1.05,-1.2 1.05,1.2, body extent -1.05,-1.05 1.05,1.05, height 0.81
IND0402 [mm] "Chip Inductor, 0402 package"
  rect 0.4x0.6 smd: 1(-0.45,0) 2(0.45,0)
  silkscreen extent 0,-0.25 0,0.25, body extent -0.5,-0.25 0.5,0.25, height 0.35
IND0603 [mm] "Chip Inductor, Body 1.55x0.85mm"
  rect 0.5x0.9 smd: 1(-0.75,0) 2(0.75,0)
  silkscreen extent -0.13,-0.43 0.13,0.38, body extent -0.85,-0.48 0.75,0.48, height 0.81
IND0805 [mm] "Chip Inductor Body 2.0x1.25mm"
  rect 0.7x1.3 smd: 1(-0.95,0) 2(0.95,0)
  silkscreen extent -0.25,-0.64 0.25,0.64, body extent -1,-0.63 1,0.63, height 0.85
IND1008 [mm] "Chip Inductor Body 2.5x2.0mm"
  rect 1x2.05 smd: 1(-1.2,0) 2(1.2,0)
  silkscreen extent -0.4,-1 0.4,1, body extent -1,-0.63 1,0.63, height 0.85
LGA-42 [mm] "LGA, 42-Leads, Body 5.15x6.95mmx1.10mm, Pitch 0.45mm"
  rect 0.5x0.25 smd: 1(-2.025,2.25) 2(-2.025,1.8) 3(-2.025,1.35) 4(-2.025,0.9) 5(-2.025,0.45) 6(-2.025,0) 7(-2.025,-0.45) 8(-2.025,-0.9) 9(-2.025,-1.35) 10(-2.025,-1.8) 11(-2.025,-2.25) 22(2.025,-2.25) 23(2.025,-1.8) 24(2.025,-1.35) 25(2.025,-0.9) 26(2.025,-0.45) 27(2.025,0) 28(2.025,0.45) 29(2.025,0.9) 30(2.025,1.35) 31(2.025,1.8) 32(2.025,2.25)
  rect 0.375x0.5 smd: 12(-2.087,-2.925) 21(2.087,-2.925) 33(2.087,2.925) 42(-2.087,2.925)
  rect 0.25x0.5 smd: 13(-1.575,-2.925) 14(-1.125,-2.925) 15(-0.675,-2.925) 16(-0.225,-2.925) 17(0.225,-2.925) 18(0.675,-2.925) 19(1.125,-2.925) 20(1.575,-2.925) 34(1.575,2.925) 35(1.125,2.925) 36(0.675,2.925) 37(0.225,2.925) 38(-0.225,2.925) 39(-0.675,2.925) 40(-1.125,2.925) 41(-1.575,2.925)
  rect 1x1 smd: 43(-0.75,1) 43(-0.75,-1) 43(0.75,1) 43(0.75,-1)
  silkscreen extent -3,-3.47 2.58,3.9, body extent -2.68,-3.57 2.68,3.57, height 1.1
LT-DD-10_V [mm] "SON, 10-Leads, Body 3x3mm, Pitch 0.5mm, Thermal Pad 2.38x1.65mm"
  rect 0.7x0.25 smd mask+0.102: 1(-1.425,1) 2(-1.425,0.5) 3(-1.425,0) 4(-1.425,-0.5) 5(-1.425,-1) 6(1.425,-1) 7(1.425,-0.5) 8(1.425,0) 9(1.425,0.5) 10(1.425,1)
  rect 1.65x2.38 smd mask+0.102: 11(0,0)
  silkscreen extent -2,-1.55 1.55,1.6, body extent -1.5,-1.5 1.5,1.5, height 0.8
"QFN-24 (4x4MM)" [mm] "QFN, 24-Leads, Body 4.00x4.00mm, Pitch 0.50mm, Thermal Pad 2.50x2.50mm, IPC Medium Density"
  rect 0.7x0.25 smd: 1(-1.9,1.25) 2(-1.9,0.75) 3(-1.9,0.25) 4(-1.9,-0.25) 5(-1.9,-0.75) 6(-1.9,-1.25) 13(1.9,-1.25) 14(1.9,-0.75) 15(1.9,-0.25) 16(1.9,0.25) 17(1.9,0.75) 18(1.9,1.25)
  rect 0.25x0.7 smd: 7(-1.25,-1.9) 8(-0.75,-1.9) 9(-0.25,-1.9) 10(0.25,-1.9) 11(0.75,-1.9) 12(1.25,-1.9) 19(1.25,1.9) 20(0.75,1.9) 21(0.25,1.9) 22(-0.25,1.9) 23(-0.75,1.9) 24(-1.25,1.9)
  rect 2.5x2.5 smd: 25(0,0)
  silkscreen extent -2.83,-2.2 2.2,2.22, body extent -2.1,-2.1 2.1,2.1, height 1
R0402[1005] [mm] "Chip Resistor, Body 1.0x0.5mm"
  rect 0.45x0.55 smd: 1(-0.45,0) 2(0.45,0)
  silkscreen extent 0,-0.2 0,0.2, body extent -0.5,-0.25 0.5,0.25, height 0.35
RGT0016C_V [mm] "QFN, 16-Leads, Body 3x3mm, Pitch 0.5mm, Thermal Pad 1.65x1.65mm"
  rrect40% 0.6x0.25 smd: 1(-1.4,0.75) 2(-1.4,0.25) 3(-1.4,-0.25) 4(-1.4,-0.75) 9(1.4,-0.75) 10(1.4,-0.25) 11(1.4,0.25) 12(1.4,0.75)
  rrect40% 0.25x0.6 smd: 5(-0.75,-1.4) 6(-0.25,-1.4) 7(0.25,-1.4) 8(0.75,-1.4) 13(0.75,1.4) 14(0.25,1.4) 15(-0.25,1.4) 16(-0.75,1.4)
  rrect6% 1.55x1.55 on Top Paste: 17(0,0)
  rrect6% 1.7x1.7 smd paste-0.85: 17(0,0)
  silkscreen extent -2.35,-1.57 1.57,1.58, body extent -1.5,-1.5 1.5,1.5, height 1
SOT323-3 [mm] "SOT23, 3-Leads, Body 2.00x2.10mm, Pitch 0.65mm, IPC Medium Density"
  rect 0.85x0.45 smd: 1(-1.055,0.65) 2(-1.055,-0.65) 3(1.055,0)
  silkscreen extent -1.18,-1.1 0.63,1.55, body extent -1.12,-1.1 1.12,1.1, height 1.1
SWITCH [mm]
  rect 1x0.65 smd: 1(-2.05,1.05) 2(2.05,1.05) 3(-2.05,-1.05) 4(2.05,-1.05)
  silkscreen extent -1.3,-1.6 1.3,1.6, body extent -2.3,-1.6 2.3,1.6, height 2.5
USB-MICROB [mil]
  rect 14x56 smd: D+(0,105) D-(-25.59,105) GND(52,105) ID(26,105) VBUS(-51.18,105)
  rect 71x75 smd: MT1(-157.48,0) MT2(158,0)
  rect 75x75 smd: P$1(-50,0) P$2(50,0)
  silkscreen extent -134,-57 134,113, body extent -157,-98 157,115, height 112
WSON-6 [mm] "SON, 6-Leads, Body 2x2mm, Pitch 0.65mm, Thermal Pad 1.6x1mm, TI Recommended"
  rect 0.45x0.3 smd: 1(-0.975,0.65) 2(-0.975,0) 3(-0.975,-0.65) 4(0.975,-0.65) 5(0.975,0) 6(0.975,0.65)
  rrect14% 1x0.7 on Top Paste: 7(0,-0.45) 7(0,0.45)
  rect 1x1.6 smd paste-0.5: 7(0,0)
  silkscreen extent -1.45,-1.2 1.05,1.2, body extent -1.05,-1.05 1.05,1.05, height 0.81
"WSON-8 (6X8MM)" [mm] "SON, 8-Leads, Body 6.00x8.00mm, Pitch 1.27mm, Thermal Pad 5.20x4.65mm, IPC Medium Density"
  rect 0.95x0.45 smd: 1(-3.87,1.905) 2(-3.87,0.635) 3(-3.87,-0.635) 4(-3.87,-1.905) 5(3.87,-1.905) 6(3.87,-0.635) 7(3.87,0.635) 8(3.87,1.905)
  rect 4.65x5.2 smd paste-2.325: 9(0,0)
  silkscreen extent -4.65,-3.2 4.2,3.25, body extent -4.05,-3.05 4.05,3.05, height 0.8

## Part data
C1 C2 C3 C4 C79 C80: library part CAP_12pF_50V_0402_5%, "12pF 50V 5% 0402 (1005 Metric)"
C5 C19 C68 C78 C83: library part CAP_0.1uF_6.3V_0402_10%, "0.1uF 6.3V 10% 0402 (1005 Metric)"
C6 C66 C71: library part CAP_3.3nF_50V_0402_10%, "3.3nF 50V 10% 0402 (1005 Metric)"
C7 C8 C9 C10 C11 C12 C13 C14 C15 C16 C17 C20 C21 C22 C23 C24 C25 C26 C27 C28 C30 C31 C33 C35 C36 C39 C40 C41 C42 C43 C44 C45 C48 C49 C50 C51 C52 C55 C56 C59 C60 C84 C85 C86 C87: library part CAP_0.22uF_6.3V_0402_10%, "0.22uF 6.3V 10% 0402 (1005 Metric)"
C18 C37 C38 C46 C47: library part CAP_22uF_6.3V_0603_10%, "22uF 6.3V 10% 0603 (1608 Metric)"
C29 C53 C54 C57 C58 C75 C76 C77: library part CAP_4.7uF_6.3V_0402_20%, "4.7uF 6.3V 20% 0402 (1005 Metric)"
C32: library part CAP_1uF_16V_0402_10%, "1uF 16V 10% 0402 (1005 Metric)"
C34 C61 C62 C63 C64 C65 C67 C69 C70: library part CAP_10uF_6.3V_0402_20%, "10uF 6.3V 20% 0402 (1005 Metric)"
C72 C73: library part CAP_1.5pF_50V_0402_0.05pF, "1.5pF 50V 0.05pF 0402 (1005 Metric)"
C74: library part CAP_2.2uF_6.3V_0402_20%, "2.2uF 6.3V 20% 0402 (1005 Metric)"
C81 C82: library part CAP_1uF_6.3V_0402_10%, "1uF 6.3V 10% 0402 (1005 Metric)"
JP1: library part USB_MICROB_SMT
L1: library part IND_2.2uH_1.7A_0805_20%, "2.2uH 20% 1.7A 0805"
L2 L3 L6: library part IND_2.2uH_750mA_0603_20%, "2.2uH 20% 750mA 0603"
L4: library part IND_2.2uH_3.3A_1008_20%, "2.2uH 20% 3.3A 1008"
L5: library part IND_3.9nH_0.3A_0402_0.3nH, "3.9nH +/-0.3nH 0.3A 0402"
Q1: "N-Channel MOSFET"
R1: library part RES_200R_0402_1%, "200R 0.063W 1% 0402 (1005 Metric)"
R2 R3 R4 R8 R9 R25: library part RES_10K_0402_1%, "10K 0.063W 1% 0402 (1005 Metric)"
R5: library part RES_15K_0402_1%, "15K 0.063W 1% 0402 (1005 Metric)"
R6: library part RES_75K_0402_1%, "75K 0.063W 1% 0402 (1005 Metric)"
R7 R12 R13: library part RES_240R_0402_1%, "240R 0.063W 1% 0402 (1005 Metric)"
R10 R11: library part RES_1K_0402_1%, "1K 0.063W 1% 0402 (1005 Metric)"
R14 R15 R16 R17 R18 R30 R31: library part RES_100K_0402_1%, "100K 0.063W 1% 0402 (1005 Metric)"
R19: library part RES_10R_0402_1%, "10R 0.063W 1% 0402 (1005 Metric)"
R20 R21: library part RES_4K7_0402_1%, "4K7 0.063W 1% 0402 (1005 Metric)"
R22: library part RES_1M_0402_1%, "1M 0.063W 1% 0402 (1005 Metric)"
R23: library part RES_150K_0402_1%, "150K 0.063W 1% 0402 (1005 Metric)"
R24: library part RES_200K_0402_1%, "200K 0.063W 1% 0402 (1005 Metric)"
R26 R27: library part RES_22R_0402_1%, "22R 0.063W 1% 0402 (1005 Metric)"
R28: library part RES_12K_0402_1%, "12K 0.063W 1% 0402 (1005 Metric)"
R29 R32 R33: library part RES_51K_0402_1%, "51K 0.063W 1% 0402 (1005 Metric)"
R34: library part RES_2M2_0402_1%, "2M2 0.063W 1% 0402 (1005 Metric)"
SW1 SW2: library part DIPT-DTSM-6, "Switch, SPNO Push Button SMD"
U1: "IC MPU I.MX6SX 1GHZ 400MAPBGA"
U2 U3: "IC SDRAM 4GBIT 933MHZ 96FBGA"
U4: library part CMP-0332-00398-2, "Low Quiescent Current, Programmable-Delay Supervisory Circuit, 1 Supply Monitored, -40 to 125 degC, 6-pin SON (DRV), Green (RoHS & no Sb/Br)"
U6: "Voltage Regulators - Switching Regulators 2.25MHz 1A Step-Down Cnvrtr 3.3V Output"
U7: library part CMP-0492-00137-1, "Dual Synchronous 800 mA, 2.25 MHz Step-Down DC/DC Regulator, 10-pin SON (DD-10), -40 to 85 degC, Pb-Free"
U8: library part CMP-0323-00115-3, "Buck Step Down Regulator with 3 to 17 V Input and 0.9 to 6 V Output, -40 to 85 degC, 16-Pin QFN (RGT), Green (RoHS & no Sb/Br)"
U9: "WI-FI-B/G/N NETWORK CONTROLLER"
U10: library part CMP-0248-00027-1, "FT234XD USB to BASIC UART IC, -40 to +85 degC, 12-Pin DFN, Pb-Free, Tape and Reel"
U11: "USB Hub IC 2-Port"
Y1 Y3: library part "FA-128 24.0000MF10Z-W3"
Y2: library part ABS06-32.768KHZ-9-1-T

## Via types
v1: diameter 12, hole 6, Component Side to Solder Side, tented both sides, 330 vias
v2: diameter 19.68, hole 7.87, Component Side to Solder Side, 12 vias
v3: diameter 19.68, hole 11.81, Component Side to Solder Side, 5 vias
v4: diameter 12, hole 6, Component Side to Solder Side, 3 vias

## Nets (pads, with @x,y where several pads share a name; then routed paths per layer and width w, separated by ;. In a path a pad name is that pad's centre, name@x,y a point inside that pad or via, vN(x,y) a via of type N, cw(c..) or ccw(c..) an arc to the next point about the centre after c; other vN are vias at no path point)
1V4: C7.2 C8.2 C9.2 C10.2 C11.2 C14.2 C15.2 C16.2 C17.2 C18.2 C20.2 C21.2 C22.2 C23.2 C24.2 C35.2 C36.2 C37.2 C43.2 C44.2 C45.2 C46.2 C69.2 C70.2 C84.2 C85.2 C86.2 C87.2 L4.2 R5.2 R10.2 R23.2 U1.D7 U1.D8 U1.G6 U1.H6 U1.H18 U1.J6 U1.J9 U1.J10 U1.J11 U1.J12 U1.K6 U1.K9 U1.K12 U1.L6 U1.L9 U1.L12 U1.M6 U1.M9 U1.M10 U1.M11 U1.M12 U1.N6 U1.P6 U2.A1 U2.A8 U2.B2 U2.C1 U2.C9 U2.D2 U2.D9 U2.E9 U2.F1 U2.G7 U2.H2 U2.H9 U2.K2 U2.K8 U2.N1 U2.N9 U2.R1 U2.R9 U3.A1 U3.A8 U3.B2 U3.C1 U3.C9 U3.D2 U3.D9 U3.E9 U3.F1 U3.G7 U3.H2 U3.H9 U3.K2 U3.K8 U3.N1 U3.N9 U3.R1 U3.R9 U8.14 | length 1776
  Component Side w5: v1(5720.27,1548.23) U1.H18@5733.07,1561.02 ; v1(5873.82,1573.82) U1.J12@5886.61,1586.61 ; v1(5873.82,1599.41) U1.K12@5886.61,1612.2 ; v1(5873.82,1650.59) U1.L12@5886.61,1637.8 ; v1(5873.82,1676.18) U1.M12@5886.61,1663.39 ; v1(5899.41,1573.82) U1.J11@5912.2,1586.61 ; v1(5899.41,1676.18) U1.M11@5912.2,1663.39 ; U1.J10@5937.8,1586.61 v1(5950.59,1573.82) ; U1.M10@5937.8,1663.39 v1(5950.59,1676.18) ; U1.J9@5963.39,1586.61 v1(5976.18,1573.82) ; U1.K9@5963.39,1612.2 v1(5976.18,1599.41) ; U1.L9@5963.39,1637.8 v1(5976.18,1650.59) ; U1.M9@5963.39,1663.39 v1(5976.18,1676.18) ; U1.D8@5988.98,1458.66 v1(6001.77,1445.87) ; U1.D7@6014.57,1458.66 v1(6027.36,1445.87) ; U1.G6@6040.16,1535.43 v1(6052.95,1522.64) ; U1.H6@6040.16,1561.02 v1(6052.95,1548.23) ; U1.J6@6040.16,1586.61 v1(6052.95,1573.82) ; U1.K6@6040.16,1612.2 v1(6052.95,1599.41) ; U1.L6@6040.16,1637.8 v1(6052.95,1650.59) ; U1.M6@6040.16,1663.39 v1(6052.95,1676.18) ; U1.N6@6040.16,1688.98 v1(6052.95,1701.77) ; U1.P6@6040.16,1714.57 v1(6052.95,1727.36) ; v1(6295,1480) 6295.28,1480.28 U2.R9@6295.28,1499.02 ; U2.R1@6295.28,1750.98 6310,1736.26 v1(6310,1735) ; v1(6355,1480) 6358.27,1483.27 U2.N9@6358.27,1499.02 ; U2.N1@6358.27,1750.98 6374.25,1735 v1(6375,1735) ; U2.K8@6452.76,1530.51 6467.52,1515.74 6467.52,1484.85 v1(6462.67,1480) ; U2.K2@6452.76,1719.49 6437.99,1734.26 6437.99,1757.1 6459.14,1778.25 v1(6475,1778.25) ; U2.H9@6515.75,1499.02 6515.75,1500.75 v1(6530,1515) ; U2.H2@6515.75,1719.49 6531.34,1735.08 v1(6531.34,1736.34) ; U2.G7@6547.24,1562.01 6547.24,1562.24 6559,1574 v1(6564.9,1574) ; U2.F1@6578.74,1750.98 6578.74,1778.74 v1(6582.27,1782.27) ; v1(6580,1460) 6610.24,1490.24 U2.E9@6610.24,1499.02 U2.D9@6641.73,1499.02 ; v1(6630,1787.5) 6631.18,1786.32 6645.18,1786.32 6673.23,1758.27 U2.C1@6673.23,1750.98 ; U2.D2@6641.73,1719.49 U2.C1@6673.23,1750.98 ; U2.C9@6673.23,1499.02 6680,1492.24 v1(6680,1475) ; U2.B2@6704.72,1719.49 U2.C1@6673.23,1750.98 ; U2.A8@6736.22,1530.51 6769.49,1530.51 v1(6770,1530) ; U2.A1@6736.22,1750.98 6737.5,1752.26 6737.5,1787.5 v1(6755,1805)
  Solder Side w5: v1(6295,1480) 6295.28,1480.28 U3.R1@6295.28,1499.02 ; U3.R9@6295.28,1750.98 6295.28,1749.72 v1(6310,1735) ; v1(6355,1480) 6358.27,1483.27 U3.N1@6358.27,1499.02 ; U3.N9@6358.27,1750.98 6359.02,1750.98 v1(6375,1735) ; v1(6420,1480) 6425,1480 6436.03,1491.03 6436.03,1513.78 U3.K2@6452.76,1530.51 ; U3.K8@6452.76,1719.49 6469.48,1736.22 6469.48,1775.52 6472.22,1778.25 v1(6475,1778.25) ; U3.H2@6515.75,1530.51 6530,1516.26 v1(6530,1515) ; U3.H9@6515.75,1750.98 6516.69,1750.98 v1(6531.34,1736.34) ; U3.G7@6547.24,1687.99 6565.51,1669.72 v1(6577.1,1669.72) ; v1@6578.74,1463.42 U3.F1@6578.74,1499.02 ; U3.D2@6641.73,1530.51 U3.C1@6673.23,1499.02 ; U3.D9@6641.73,1750.98 U3.E9@6610.24,1750.98 6610.24,1767.74 v1(6630,1787.5) 6649.77,1787.5 6673.23,1764.04 U3.C9@6673.23,1750.98 ; v1(6680,1475) 6680,1487.71 6670.96,1496.75 U3.C1@6673.23,1499.02 ; U3.B2@6704.72,1530.51 U3.C1@6673.23,1499.02 ; U3.A1@6736.22,1499.02 6769.02,1499.02 6768.03,1500 v1(6765,1500) ; U3.A8@6736.22,1719.49 6738.34,1719.49 6756.53,1737.68 v1(6762.5,1737.68)
1V8: C63.2 L2.2 U7.1